# Altium PCB ControlBoard.PcbDoc
Units mil, origin at the board's own origin, x right, y up, seen from the top; angles counter-clockwise.
Board outline 4200 x 2775 mil, 2 copper layers (L1, L2), stack 62.8 mil thick; 38 components, 25 nets, 134 pads, 0 vias.
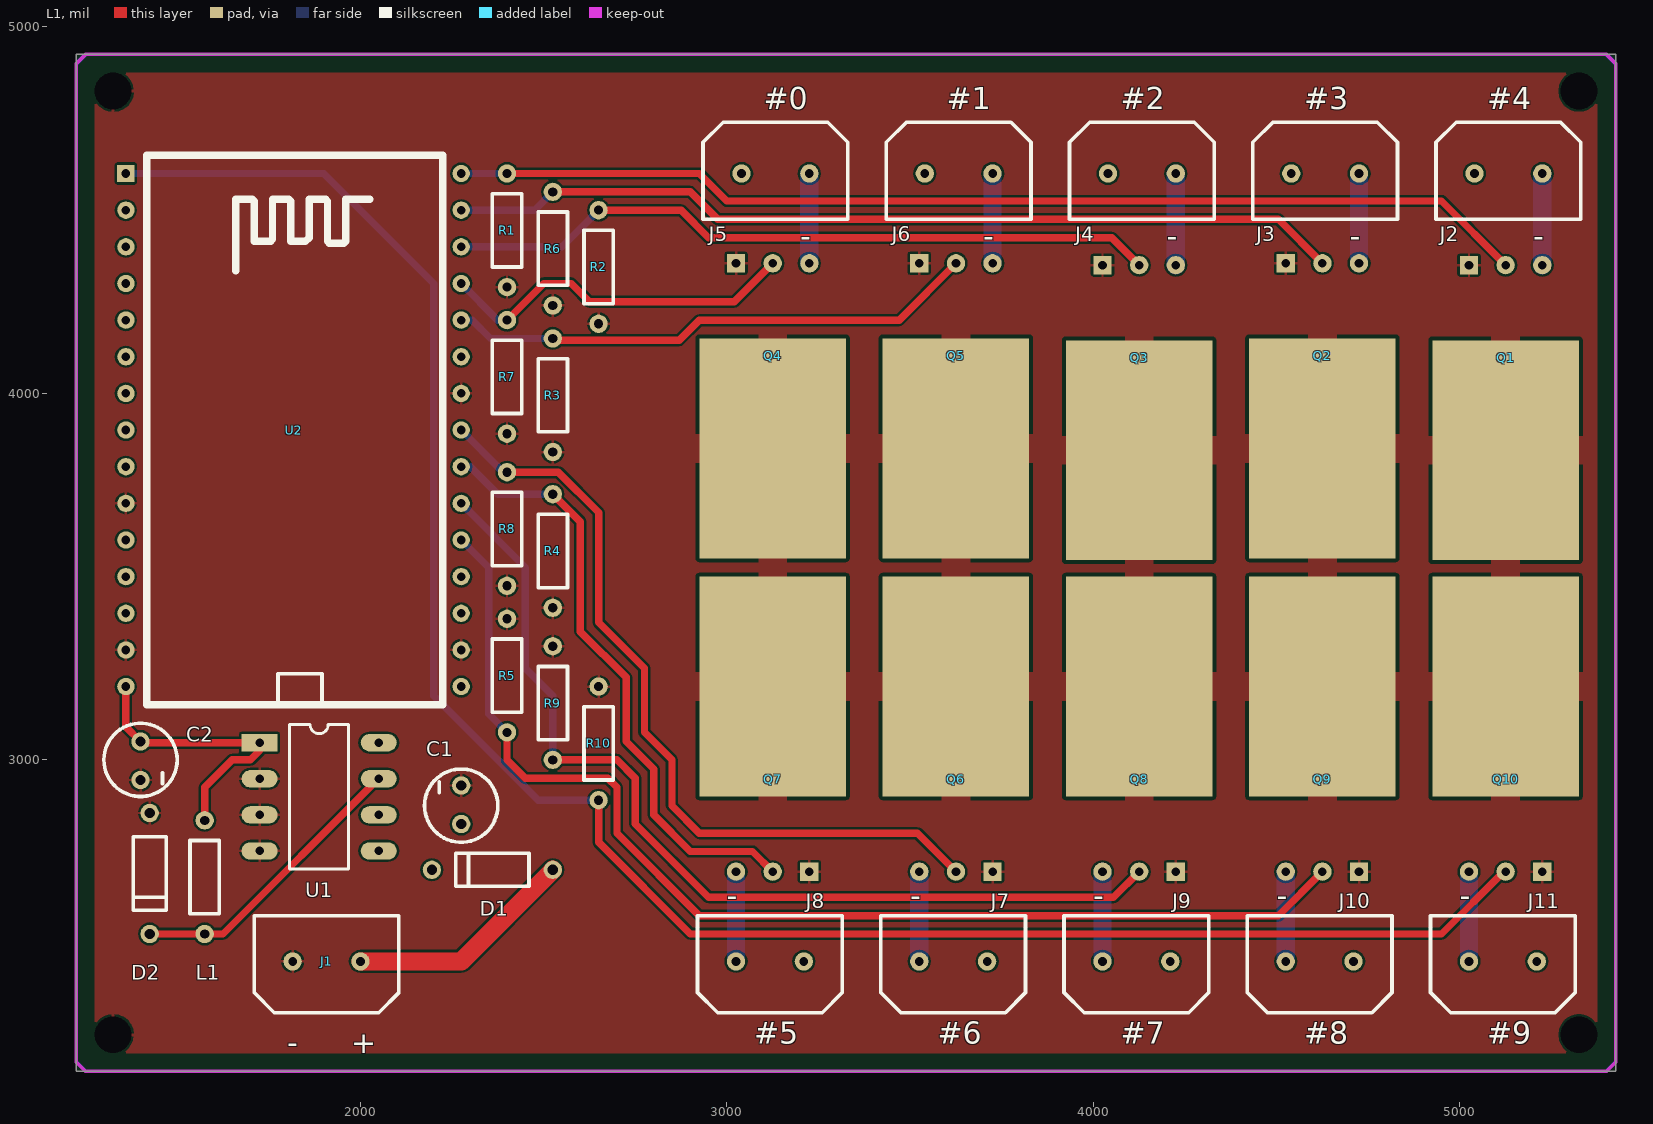
[diagram p0: L1 view]
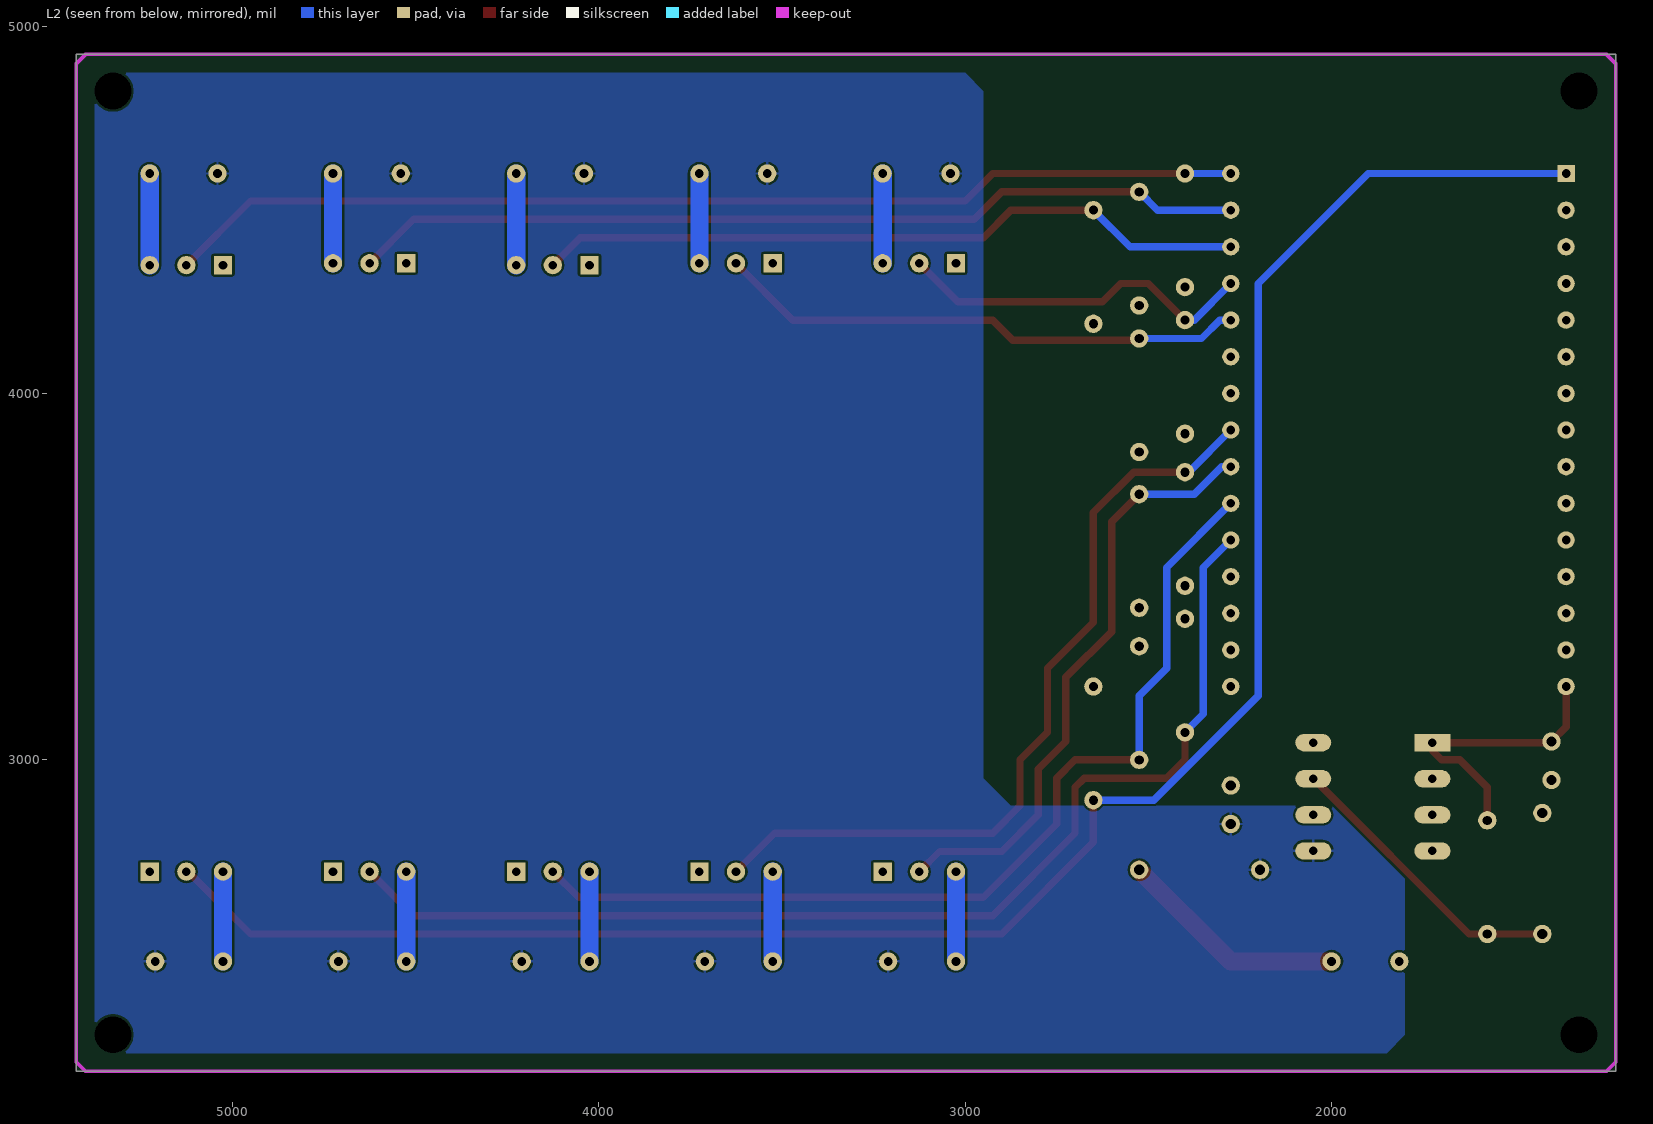
[diagram p1: L2 view, seen from below]

## Layer stack, top to bottom
Top Solder: solder mask 0.1, Solder Resist, Dk 0
L1: signal copper 1.4
Core: dielectric 60, FR-4, Dk 4.6
L2: signal copper 1.4
Bottom Solder: solder mask 0.1, Solder Resist, Dk 0

## Board outline
1225,2150 5425,2150 5425,4925 1225,4925

## Design rules (kind name [scope] priority, off if disabled: settings)
BoardOutlineClearance [All] p1: gap=15 ignorepadtopadclearanceinfootprint=FALSE
Clearance [All] p1: gap=6 ignorepadtopadclearanceinfootprint=FALSE except(0: Arc-Hole Track-Hole SMDPad-Hole THPad-Hole Via-Hole Fill-Hole Poly-Hole Region-Hole Text-Hole)
ComponentClearance [All] p1: gap=1 collisioncheckmode=3 verticalgap=1 showdistances=FALSE
DiffPairsRouting [All] p1: maxlimit=393.7 minlimit=6 mostfreqgap=8 toplayer_minwidth=6 toplayer_maxwidth=15 toplayer_prefwidth=8 bottomlayer_minwidth=6 bottomlayer_maxwidth=15 bottomlayer_prefwidth=8 maxuncoupledlength=500
HoleSize [All] p1: absolutevalues=TRUE maxlimit=265 minlimit=13 maxpercent=80.000 minpercent=20.000
HoleToHoleClearance [All] p1: gap=10 allowstackedmicrovias=FALSE
MinimumAnnularRing [All] p1: minimumring=7
MinimumSolderMaskSliver [All] p1: minsoldermaskwidth=0
PlaneClearance [All] p1: clearance=10
PlaneConnect Thermals_HeatSink [HasFootprint('MOSFET N THT')] p1: planeconnectstyle=Direct reliefexpansion=20 reliefentries=4 reliefconductorwidth=60 reliefairgap=10
PlaneConnect [All] p2: planeconnectstyle=Direct reliefexpansion=16 reliefentries=4 reliefconductorwidth=6 reliefairgap=6
PolygonConnect Thermals_HeatSink_1 [PadXSize_TopLayer > 100] p1: connectstyle=Relief reliefconductorwidth=80 reliefentries=4 polygonreliefangle="90 Angle" airgapwidth=10
PolygonConnect [All] p2: connectstyle=Relief reliefconductorwidth=8 reliefentries=4 polygonreliefangle="90 Angle" airgapwidth=6
RoomDefinition ControlBoard [InComponentClass('ControlBoard')] p1 off: confinementstyle=ConfineOut formatcopy=TRUE lockcomponents=FALSE outline 840,840 1025,840 1025,1000 840,1000
RoutingCorners [All] p1: cornerstyle=45-Degree minsetback=49.21 maxsetback=49.21
RoutingVias [All] p1: holewidth=15 width=30 viastyle="Through Hole" minholewidth=13 minwidth=27 maxholewidth=100 maxwidth=114
SilkToSilkClearance [All] p1: silktosilkclearance=0
SilkToSolderMaskClearance [IsPad] p1: minsilkscreentomaskgap=6 clearancetoexposedcopper=TRUE
SolderMaskExpansion [All] p1: expansion=2.95
Width Width_12V [InNet('12V')] p1: maxlimit=100 minlimit=50 preferedwidth=50
Width [All] p2: maxlimit=400 minlimit=6 preferedwidth=8
20 further rules are at their usual default settings.

## Components (designator, comment, footprint, x,y, rotation, side; value= is the part's Value field where it differs from the comment)
C1 "" "Cap Polarized Radial Small" 2275,2875 r90 top value=22uF
C2 "" "Cap Polarized Radial Small" 1400,3000 r270 top value=22uF
D1 "" Diode 2525,2700 r180 top
D2 "" Diode 1425,2855 r270 top
J1 "*" "Header 2x1" 2000,2450 r270 top
J2 "*" "Header 2x1" 5040,4600 r90 top
J3 "*" "Header 2x1" 4540,4600 r90 top
J4 "*" "Header 2x1" 4040,4600 r90 top
J5 "*" "Header 2x1" 3040,4600 r90 top
J6 "*" "Header 2x1" 3540,4600 r90 top
J7 "*" "Header 2x1" 3710,2450 r270 top
J8 "*" "Header 2x1" 3210,2450 r270 top
J9 "*" "Header 2x1" 4210,2450 r270 top
J10 "*" "Header 2x1" 4710,2450 r270 top
J11 "*" "Header 2x1" 5210,2450 r270 top
L1 "" RES 1575,2380 r90 top value=330uH
Q1 "MOSFET-30N06L" "MOSFET N THT" 5025,4350 r90 top
Q2 "MOSFET-30N06L" "MOSFET N THT" 4525,4355 r90 top
Q3 "MOSFET-30N06L" "MOSFET N THT" 4025,4350 r90 top
Q4 "MOSFET-30N06L" "MOSFET N THT" 3025,4355 r90 top
Q5 "MOSFET-30N06L" "MOSFET N THT" 3525,4355 r90 top
Q6 "MOSFET-30N06L" "MOSFET N THT" 3725,2695 r270 top
Q7 "MOSFET-30N06L" "MOSFET N THT" 3225,2695 r270 top
Q8 "MOSFET-30N06L" "MOSFET N THT" 4225,2695 r270 top
Q9 "MOSFET-30N06L" "MOSFET N THT" 4725,2695 r270 top
Q10 "MOSFET-30N06L" "MOSFET N THT" 5225,2695 r270 top
R1 "" RES 2400,4745 r270 top value=1K
R2 "" RES 2650,4645 r270 top value=1K
R3 "" RES 2525,4295 r270 top value=1K
R4 "" RES 2525,3870 r270 top value=1K
R5 "" RES 2400,2930 r90 top value=1K
R6 "" RES 2525,4695 r270 top value=1K
R7 "" RES 2400,4345 r270 top value=1K
R8 "" RES 2400,3930 r270 top value=1K
R9 "" RES 2525,2855 r90 top value=1K
R10 "" RES 2650,2745 r90 top value=1K
U1 "REG 5V BUCK 2M2574" PDIP8 1724.8,3046.85 r0 top
U2 "ESP8266" NODEMCU 1360,4600 r0 top

## Footprints (in the part's own frame and the unit in brackets; to place one, negate y for a bottom-side part, rotate by r counter-clockwise, add the part's x,y. Pads: shape width x height; smd on the part's side, far side on the other; paste and mask are expansions set on the pad)
"Cap Polarized Radial Small" [mil]
  round 50 hole 28: A(-50,0) K(55,0)
  silkscreen extent -100,-100 100,100
Diode [mil]
  round 50 hole 28: A(0,0) K(330,0)
  silkscreen extent 65,-45 265,45
"Header 2x1" [mm]
  round 1.27 hole 0.6: 1(0,0) 2(0,-4.699)
  silkscreen extent -3.18,-7.37 3.56,2.67
"MOSFET N THT" [mm]
  round 1.27 hole 0.6: 1(0,-5.08) 2(0,-2.54)
  rect 15.24x10.16 smd: 3(-12.827,-2.54)
  rect 1.27x1.27 hole 0.6: 3(0,0)
NODEMCU [mm]
  rect 1.2x1.2 hole 0.6: 1(0,0)
  round 1.2 hole 0.6: 2(0,-2.54) 3(0,-5.08) 4(0,-7.62) 5(0,-10.16) 6(0,-12.7) 7(0,-15.24) 8(0,-17.78) 9(0,-20.32) 10(0,-22.86) 11(0,-25.4) 12(0,-27.94) 13(0,-30.48) 14(0,-33.02) 15(0,-35.56) 16(23.241,-35.56) 17(23.241,-33.02) 18(23.241,-30.48) 19(23.241,-27.94) 20(23.241,-25.4) 21(23.241,-22.86) 22(23.241,-20.32) 23(23.241,-17.78) 24(23.241,-15.24) 25(23.241,-12.7) 26(23.241,-10.16) 27(23.241,-7.62) 28(23.241,-5.08) 29(23.241,-2.54) 30(23.241,0)
  silkscreen extent 1.43,-36.83 21.97,1.27
PDIP8 [mm]
  rect 2.5x1.2 hole 0.6: 1(0,0)
  oval 2.5x1.2 hole 0.6: 2(0,-2.5) 3(0,-5) 4(0,-7.5) 5(8.26,-7.5) 6(8.26,-5) 7(8.26,-2.5) 8(8.26,0)
  silkscreen extent 2.08,-8.75 6.18,1.25
RES [mil]
  round 50 hole 25: 1(145,0) 2(455,0)
  silkscreen extent 200,-40 400,40

## Part data
C1 C2: library part "CAP POLARIZED", "Polarized Capacitor"
D1 D2: library part "DIODE SCHOTTKY", "Schottky Diode", PN=11DQ06
J1 J2 J3 J4 J5 J6 J7 J8 J9 J10 J11: library part "CONN 2-PIN"
L1: library part INDUCTOR, "Inductor"
Q1 Q2 Q3 Q4 Q5 Q6 Q7 Q8 Q9 Q10: "N-Channel MOSFET"
R1 R2 R3 R4 R5 R6 R7 R8 R9 R10: library part RES, "Resistor"
U1: "5V Buck Regulator IC"
U2: library part "ESP8266 DEV", "ESP8266 Dev Shield"

## Free pads (board coordinates)
  round 0 hole 100 unplated: 2(1325,2250) 2(1325,4825)
  round 0 hole 100: 2(5325,2250) 2(5325,4825)

## Nets (pads, with @x,y where several pads share a name; then routed paths per layer and width w, separated by ;. In a path a pad name is that pad's centre, name@x,y a point inside that pad or via, vN(x,y) a via of type N, cw(c..) or ccw(c..) an arc to the next point about the centre after c; other vN are vias at no path point)
12V: C1.A D1.K J2.1 J3.1 J4.1 J5.1 J6.1 J7.1 J8.1 J9.1 J10.1 J11.1 U1.5
GND: C1.K C2.K D2.A J1.2 pad.2@1325,2250 pad.2@1325,4825 Q1.3 Q2.3 Q3.3 Q4.3 Q5.3 Q6.3 Q7.3 Q8.3 Q9.3 Q10.3 R1.2 R2.2 R3.2 R4.2 R5.2 R6.2 R7.2 R8.2 R9.2 R10.2 U1.2 U1.3 U1.4 U2.10 U2.14 U2.17 U2.24
NetD1_A: D1.A J1.1 | length 628.6
  L1 w50: J1.1 2275,2450 D1.A
NetD2_K: D2.K L1.1 U1.7 | length 800.4
  L1 w20: D2.K L1.1 1625,2525 2048.43,2948.43 U1.7
NetJ2_2: J2.2 Q1.1 | length 250
  L2 w50: Q1.1 J2.2
NetJ3_2: J3.2 Q2.1 | length 245
  L2 w50: Q2.1 J3.2
NetJ4_2: J4.2 Q3.1 | length 250
  L2 w50: Q3.1 J4.2
NetJ5_2: J5.2 Q4.1 | length 245
  L2 w50: Q4.1 J5.2
NetJ6_2: J6.2 Q5.1 | length 245
  L2 w50: Q5.1 J6.2
NetJ7_2: J7.2 Q6.1 | length 245
  L2 w50: J7.2 Q6.1
NetJ8_2: J8.2 Q7.1 | length 245
  L2 w50: J8.2 Q7.1
NetJ9_2: J9.2 Q8.1 | length 245
  L2 w50: J9.2 Q8.1
NetJ10_2: J10.2 Q9.1 | length 245
  L2 w50: J10.2 Q9.1
NetJ11_2: J11.2 Q10.1 | length 245
  L2 w50: J11.2 Q10.1
NetQ1_2: Q1.2 R1.1 U2.30 | length 2953.6
  L1 w20: R1.1 2925,4600 3000,4525 4950,4525 Q1.2
  L2 w20: U2.30 R1.1
NetQ2_2: Q2.2 R6.1 U2.29 | length 2451.5
  L1 w20: R6.1 2900,4550 2975,4475 4505,4475 Q2.2
  L2 w20: U2.29 2475,4500 R6.1
NetQ3_2: Q3.2 R2.1 U2.28 | length 1953.6
  L1 w20: R2.1 2875,4500 2950,4425 4050,4425 Q3.2
  L2 w20: U2.28 2550,4400 R2.1
NetQ4_2: Q4.2 R7.1 U2.27 | length 997
  L1 w20: R7.1 2500,4300 2575,4300 2625,4250 3020,4250 Q4.2
  L2 w20: U2.27 2375,4200 R7.1
NetQ5_2: Q5.2 R3.1 U2.26 | length 1462.7
  L1 w20: R3.1 2525,4145 2870,4145 2925,4200 3470,4200 Q5.2
  L2 w20: U2.26 2305,4200 2355,4150 R3.1
NetQ6_2: Q6.2 R8.1 U2.23 | length 2200.6
  L1 w20: R8.1 2540,3785 2650,3675 2650,3375 2775,3250 2775,3075 2850,3000 2850,2875 2925,2800 3520,2800 Q6.2
  L2 w20: U2.23 2390,3785 R8.1
NetQ7_2: Q7.2 R4.1 U2.22 | length 1659.2
  L1 w20: R4.1 2600,3650 2600,3350 2725,3225 2725,3050 2800,2975 2800,2850 2900,2750 3070,2750 Q7.2
  L2 w20: U2.22 2300,3800 2375,3725 R4.1
NetQ8_2: Q8.2 R9.1 U2.21 | length 2661.1
  L1 w20: R9.1 2700,3000 2750,2950 2750,2825 2950,2625 4055,2625 Q8.2
  L2 w20: U2.21 2450,3525 2450,3250 2525,3175 R9.1
NetQ9_2: Q9.2 R5.1 U2.20 | length 3175.7
  L1 w20: R5.1 2400,3000 2450,2950 2675,2950 2700,2925 2700,2800 2925,2575 4505,2575 Q9.2
  L2 w20: U2.20 2350,3525 2350,3125 R5.1
NetQ10_2: Q10.2 R10.1 U2.1 | length 5421.3
  L1 w20: R10.1 2650,2775 2900,2525 4950,2525 5120,2695 Q10.2
  L2 w20: U2.1 1900,4600 2200,4300 2200,3175 2485,2890 R10.1
VCC: C2.A L1.2 U1.1 U2.15 | length 795.9
  L1 w20: U2.15 1360,3090 C2.A 1403.15,3046.85 U1.1 1724.8,3024.8 1700,3000 1650,3000 1575,2925 L1.2
pads on no net: U1.6 U1.8 U2.2 U2.3 U2.4 U2.5 U2.6 U2.7 U2.8 U2.9 U2.11 U2.12 U2.13 U2.16 U2.18 U2.19 U2.25

## Polygon pours and split planes (outlines as drawn)
12V on L2 "12V_L02_P006" (solid, pour order 6): 1800,2250 1850,2200 5325,2200 5375,2250 5375,4824.98 5325.02,4875 3000,4875 2950,4825 2950,2950 2875,2875 2000,2875 1800,2675
GND on L1 "GND_L01_P008" (solid, pour order 8): 1275,4825 1325,4875 5325,4875 5375,4825 5375,2250 5325.02,2200.02 1325.02,2199.98 1275,2250

## Keep-outs
Keep-Out Layer:
  lines w10: 1225,2175 1250,2150 5400,2150 5425,2175 5425,4900 5400,4925 1250,4925 1225,4900 1225,2175

## Silkscreen, mask and mechanical layers (free items; w line width, h text height)
Top Overlay:
  text "#0" at 3100,4775 h60
  text "#1" at 3600,4775 h60
  text "#2" at 4075,4775 h60
  text "#3" at 4575,4775 h60
  text "#4" at 5075,4775 h60
  text "-" at 3200,4400 h60
  text "-" at 3700,4400 h60
  text "-" at 4200,4400 h60
  text "-" at 4700,4400 h60
  text "-" at 5200,4400 h60
  text "-" at 3000,2600 h60
  text "-" at 3500,2600 h60
  text "-" at 4000,2600 h60
  text "-" at 4500,2600 h60
  text "-" at 5000,2600 h60
  text "#5" at 3075,2225 h60
  text "#6" at 3575,2225 h60
  text "#7" at 4075,2225 h60
  text "#8" at 4575,2225 h60
  text "#9" at 5075,2225 h60
  text "-" at 1800,2200 h60
  text "+" at 1975,2200 h60
Top Solder:
  text "tyler.vc" at 1425,4750 h60